# Altium PCB PCB Layout.PcbDoc (part 3 of 3)
Units mm, origin at the board's own origin, x right, y up, seen from the top; angles counter-clockwise.
Board outline 100.03 x 55.01 mm, 4 copper layers (Top Layer, Signal Layer 2, Signal Layer 1, Bottom Layer), stack 0.779 mm thick; 236 components, 218 nets, 813 pads, 395 vias.
Unrouted connection lines stored in the file: 15.
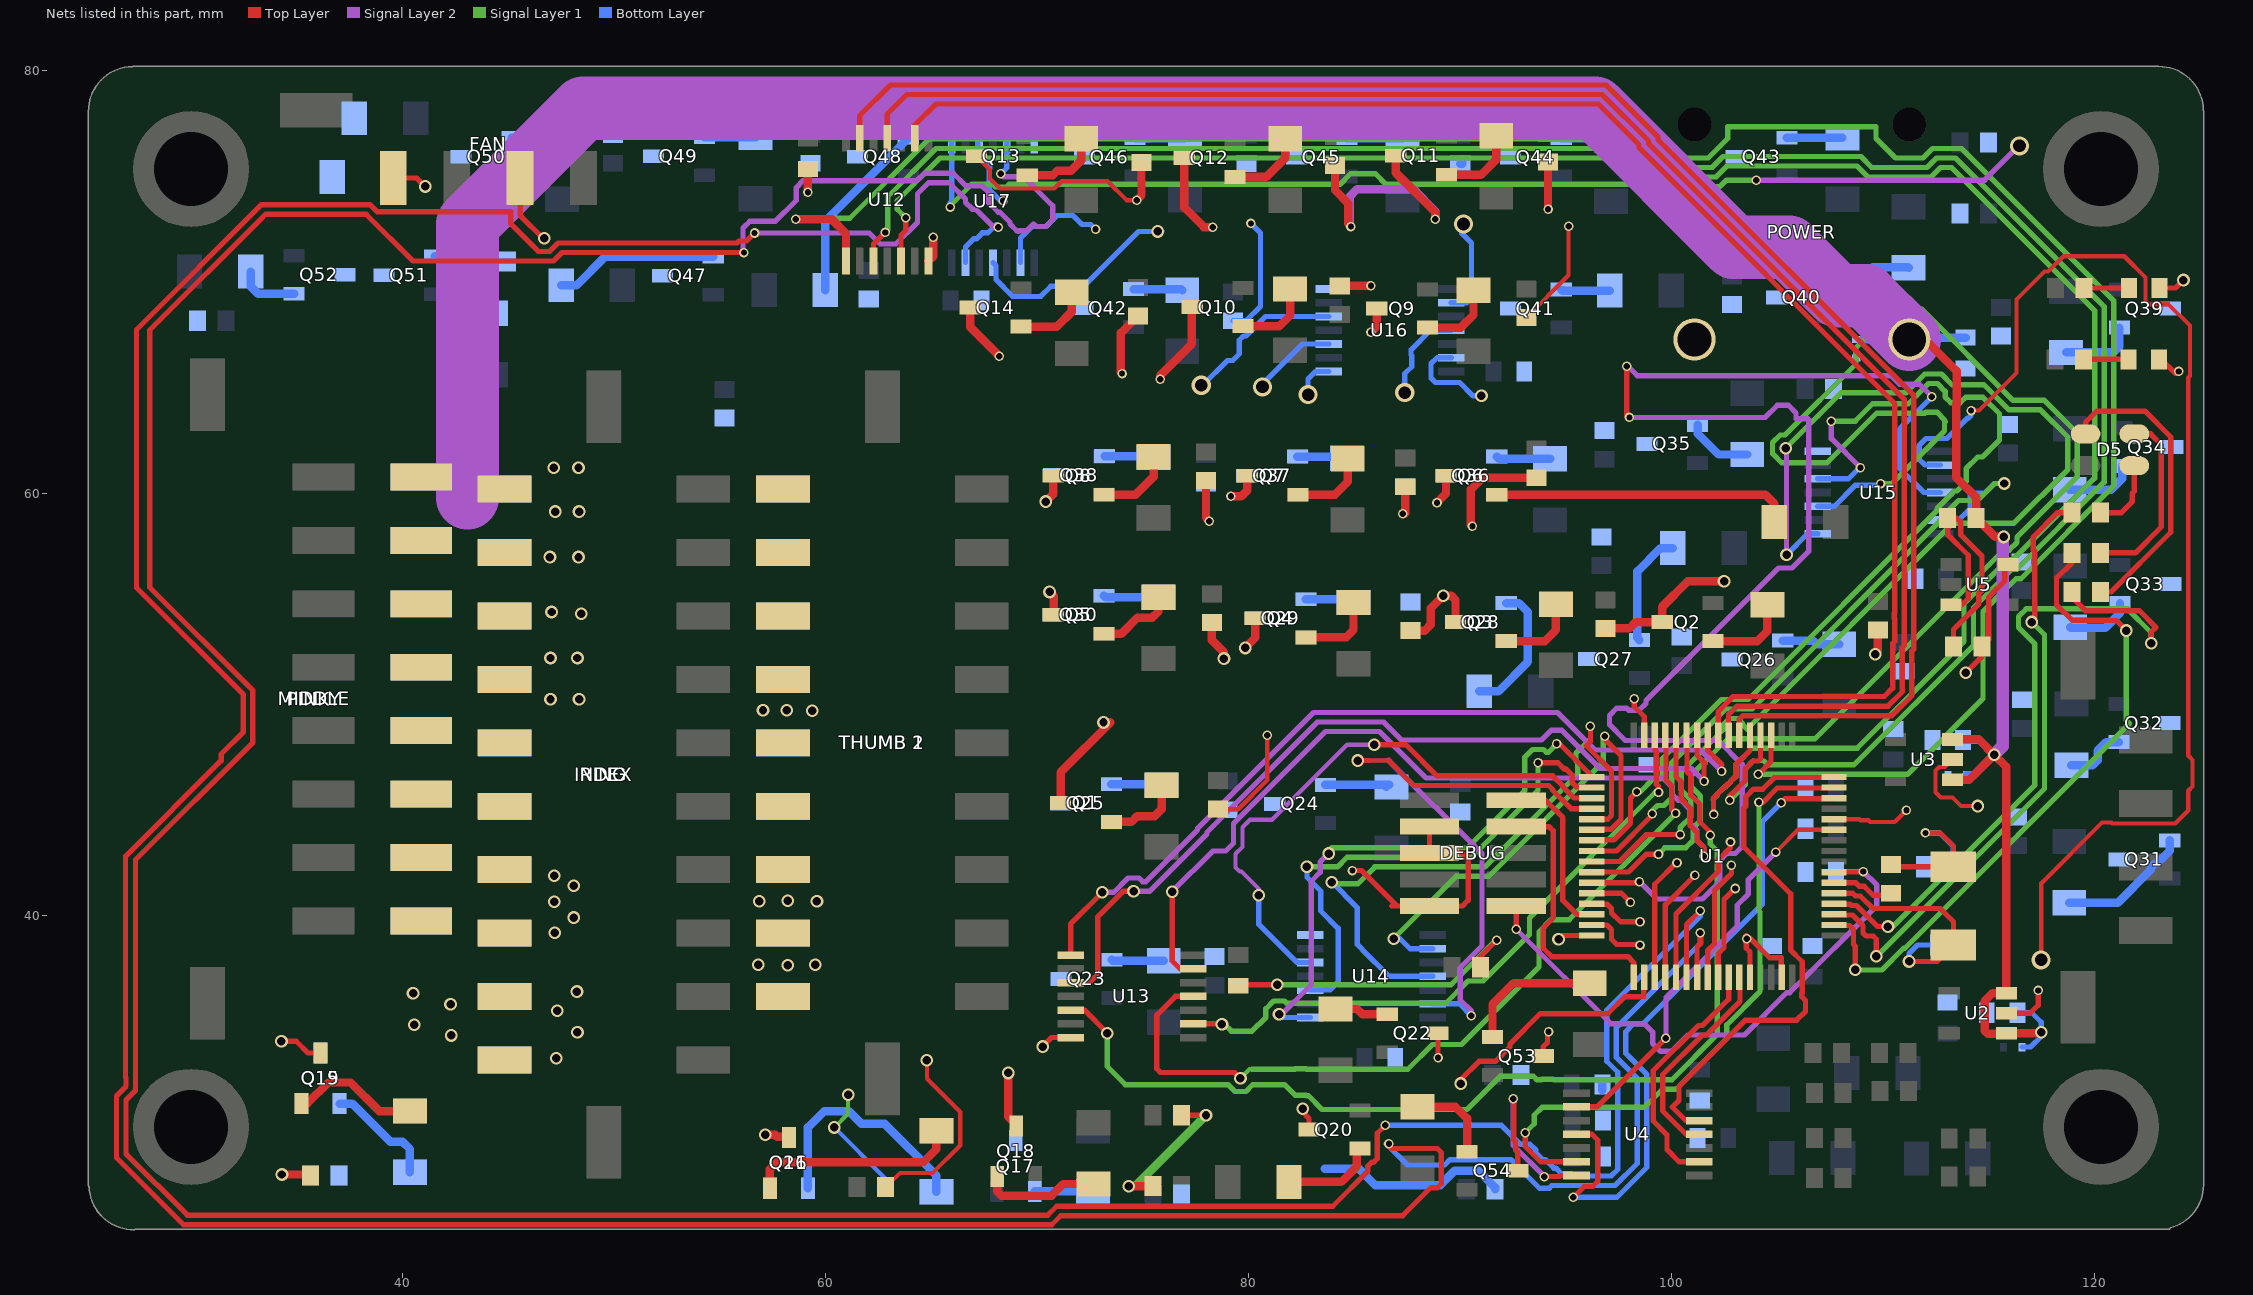
[diagram p5: the nets of this part, all layers, seen from the top]

## Via types
v1: diameter 0.6, hole 0.4, Top Layer to Bottom Layer, tented top, 220 vias
v2: diameter 0.45, hole 0.3, Top Layer to Bottom Layer, tented top, 162 vias
v3: diameter 0.9, hole 0.6, Top Layer to Bottom Layer, tented top, 9 vias
v4: diameter 0.45/0.6/0.6/0.6 (per signal layer), hole 0.3, Top Layer to Bottom Layer, tented top, 1 vias
v5: diameter 0.6/0.6/0.6/0.6 (per signal layer), hole 0.4, Top Layer to Bottom Layer, tented top, 1 vias
v6: diameter 0.6, hole 0.4, Top Layer to Bottom Layer, tented both sides, 1 vias
v7: diameter 0.54, hole 0.3, Top Layer to Bottom Layer, tented top, 1 vias

## Nets (pads, with @x,y where several pads share a name; then routed paths per layer and width w, separated by ;. In a path a pad name is that pad's centre, name@x,y a point inside that pad or via, vN(x,y) a via of type N, cw(c..) or ccw(c..) an arc to the next point about the centre after c; other vN are vias at no path point) (continued)
GND: 3.3VA.2 3.3VD.2 C1.1 C2.1 C3.1 C4.1 C5.1 C6.1 C7.1 C8.1 C9.1 C10.1 C11.2 C12.2 C13.1 C15.1 C16.1 C17.1 C18.1 C19.1 C20.1 C21.1 C22.1 C23.1 C24.1 C25.1 D2.2 D6.1 D7.2 D8.2 DEBUG.3 DEBUG.5 DEBUG.9 FAN.2 FAN.4 POWER.2 Q1.3 Q2.3 Q3.3 Q4.3 Q5.3 Q6.3 Q7.3 Q8.3 Q9.3 Q10.3 Q11.3 Q12.3 Q13.3 Q14.3 Q15.3 Q16.3 Q17.3 Q18.3 Q19.3 Q20.3 Q21.3 Q22.3 Q23.3 Q24.3 Q25.3 Q26.3 Q27.3 Q28.3 Q29.3 Q30.3 Q31.3 Q32.3 Q33.3 Q34.3 Q35.3 Q36.3 Q37.3 Q38.3 Q39.3 Q40.3 Q41.3 Q42.3 Q43.3 Q44.3 Q45.3 Q46.3 Q47.3 Q48.3 Q49.3 Q50.3 Q51.3 Q52.3 Q53.3 Q54.3 R14.1 R15.1 R16.1 R17.1 R18.1 R19.1 R20.1 R21.1 R22.1 R23.1 R24.1 R25.1 R26.1 R27.1 R28.1 R29.1 R30.1 R31.1 R32.1 R33.1 R34.1 R35.1 R36.1 R37.1 R38.1 R39.1 R40.1 R41.1 R42.1 R43.1 R44.1 R45.1 R46.1 R47.1 R48.1 R49.1 R50.1 R51.1 R52.1 R53.1 R54.1 R55.1 R56.1 R57.1 R58.1 R59.1 R60.1 R61.1 R62.1 R63.1 R64.1 R65.1 R66.1 R67.1 R72.2 U1.12 U1.31 U1.60 U1.63 U2.2 U3.2 U4.7 U5.5 U12.7 U13.7 U14.7 U15.7 U16.7 U17.7 | length 207.4
  Top Layer w0.2: R32.1@62.85,27.175 63.525,27.85 65.074,27.85 66.375,29.151 66.375,30.725 64.8,32.3 v1(64.8,33.175) ; Q13.3@67.15,75.925 67.775,75.3 67.775,74.883 68.258,74.4 70.826,74.4 71.176,74.75 73.342,74.75 74.239,73.854 v2(74.729,73.854) ; R66.1@78.575,45.05 79.525,45.05 80.9,46.425 v2(80.9,48.55) ; R22.1@93.15,68.3 95.15,70.3 v2(95.15,72.625) ; U1.12@107.7,44.575 108.901,44.575 108.951,44.525 109.326,44.525 109.401,44.45 110.575,44.45 v2(111.125,45) ; U3.2@113.3,47.4 112.95,47.05 112.676,47.05 112.5,46.874 112.5,45.85 112.75,45.6 113.3,45.6 113.7,45.2 v1(114.5,45.2)
  Top Layer w0.25: v1(34.275,34.075) 34.975,34.075 35.525,33.525 Q19.3@36.125,33.525 ; FAN.4@39.565,74.905 40.67,74.905 v1(41.075,74.5) ; FAN.2@45.565,74.905 45.565,73.135 46.65,72.05 v1(46.7,72.05) ; v1(70.275,33.825) 70.7,34.25 U13.7@71.6,34.25 ; R29.1@76.85,30.575 v1(78,30.575) ; C22.1@79.525,36.7 79.602,36.777 79.629,36.75 v1(81.375,36.75) ; v1(82.579,30.877) 82.579,30.729 82.575,30.725 82.875,30.425 Q20.3@82.875,29.9 ; v2(84.925,42.15) 85.35,42.15 87.025,40.475 ; 86.775,40.475 DEBUG.9@88.575,40.475 90.125,40.475 90.4,40.75 90.4,42.675 90.1,42.975 DEBUG.5@88.575,42.975 DEBUG.3@88.575,44.225 ; v2(88.975,33.3) Q22.3@88.975,34.45 ; R33.1@90.975,37.575 90.975,38.075 v2(91.75,38.85) ; v2@92.55,31.352 92.55,29.416 92.65,29.316 92.65,28.914 92.75,28.814 Q54.3@92.75,27.95 ; Q53.3@93.95,33.375 93.95,33.825 94.15,34.025 94.15,34.475 v2(94.2,34.525) ; v2(94,27.675) 94.725,27.675 94.775,27.725 U4.7@95.525,27.725 ; v2(98.255,50.277) 98.255,49.895 98.725,49.425 U1.31@98.725,48.55 ; U1.60@103.725,37.1 103.725,38.3 103.55,38.475 103.55,39.075 103.58,39.045 v2(103.58,38.927) 103.748,38.927 104.65,38.025 105.2,38.025 105.2,37.125 U1.63@105.225,37.1 ; v1(113.925,51.5) 114.7,52.275 R72.2@114.7,52.75 115.025,53.075 115.025,55.085 115.15,55.21 115.15,55.227 115.774,55.851 115.774,56.474 U5.5@115.925,56.625 ; U2.2@115.85,35.4 116.975,35.4 117.356,35.781 v2(117.356,36.477) ; 3.3VD.2@123.075,66.325 123.128,66.378 123.853,65.653 123.906,65.653 v2(124.006,65.753) ; 3.3VA.2@123.1,69.7 123.85,69.7 v1(124.225,70.075)
  Top Layer w0.4: v1(34.3,27.775) 35.6,27.775 R30.1@35.65,27.725 ; v1(57.15,29.65) 57.625,29.65 57.725,29.55 58.25,29.55 Q21.3@58.275,29.525 ; v2(59.175,74.225) C19.1@59.175,75.325 ; U12.7@64.875,70.975 65.103,71.203 v2(65.103,72.104) ; Q14.3@66.85,68.775 66.85,67.85 v2(68.225,66.475) ; v1(68.653,32.577) 68.653,30.497 69.05,30.1 Q18.3@69.025,30.075 ; v1(70.425,59.6) 70.775,59.95 Q8.3@70.775,60.825 ; v1(70.6,55.325) 70.8,55.125 70.8,54.275 Q5.3@70.775,54.25 ; Q1.3@71.125,45.35 71.125,46.8 73.475,49.15 73.473,49.152 v1(73.154,49.152) ; v2(74.029,65.653) 73.975,65.707 73.975,67.575 R23.1@74.775,68.375 ; v6(74.35,27.225) R31.1@75.5,27.225 ; v2(74.729,73.854) 74.95,74.075 R24.1@74.95,75.625 ; v2(75.829,65.378) 75.829,65.546 75.825,65.55 77.325,67.05 77.325,68.775 Q10.3@77.35,68.8 ; Q12.3@76.975,75.85 76.975,73.5 77.9,72.575 v2(78.325,72.575) ; R18.1@78,60.6 78,58.824 v2@78.149,58.675 ; R16.1@78.275,53.875 78.275,53.05 78.85,52.475 v1(78.85,52.175) ; v2(79.179,59.853) 79.678,59.853 79.95,60.125 Q7.3@79.95,60.825 ; v1(79.85,52.675) 80.325,53.15 Q4.3@80.325,54.075 ; R25.1@84.1,75.5 84.1,74.325 84.725,73.7 84.725,72.733 v2(84.854,72.604) ; R21.1@84.325,69.8 v2(85.8,69.8) ; v2(85.8,67.6) 86.075,67.875 Q9.3@86.075,68.725 ; Q11.3@86.975,75.95 86.975,75.15 88.85,73.275 v2(88.85,72.95) ; v2(87.304,59.028) 87.403,59.028 87.425,59.05 R19.1@87.425,60.3 ; R15.1@87.675,53.5 88.35,53.5 88.625,53.775 88.625,54.55 v1(89.225,55.15) 89.6,55.15 89.8,54.95 Q3.3@89.8,53.9 ; v2(88.925,59.55) 89.35,59.975 Q6.3@89.35,60.825 ; v2(90.6,58.425) 90.525,58.5 90.525,60.175 91.075,60.725 R17.1@93.625,60.725 ; v2(94.175,73.425) R20.1@94.175,75.65 ; R14.1@96.9,53.6 98.025,53.6 98.325,53.9 Q2.3@99.575,53.9 99.575,54.625 100.775,55.825 v1(102.5,55.825) ; v1(109.65,52.375) 109.775,52.5 R67.1@109.775,53.525
  Signal Layer 2 w0.25: v2(92.53,31.352) 92.53,29.145 v2(94,27.675)
  Signal Layer 2 w0.4: v2(84.854,72.604) 84.8,72.658 84.8,74.025 85.15,74.375 87.8,74.375 88.85,73.325 v2(88.85,72.95)
  Signal Layer 1 w0.2: v1(60.425,30) 61.075,30.65 v1(61.075,31.55)
  Signal Layer 1 w0.25: v1(81.375,36.75) 89.58,36.75 91.68,38.85 v2(91.75,38.85)
  Signal Layer 1 w0.4: v6(74.35,27.225) 74.375,27.25 74.675,27.25 v1(78,30.575)
  Bottom Layer w0.2: v1(60.425,30) 62.85,27.575 R27.1@62.85,27.175
  Bottom Layer w0.25: R51.1@79.275,68.15 79.9,68.15 80.575,68.825 80.575,72.3 v2(80.125,72.75)
  Bottom Layer w0.4: 83.625,28.05 85.222,28.05 85.995,27.276 89.086,27.276 89.759,27.95 90.891,27.95 91.675,27.166 R65.1@91.675,27.075 ; R56.1@90.025,75.575 90.116,75.575 R56.1@90.116,75.766 ; C15.1@96.735,31.75 96.75,31.75 C15.1@96.75,32.025
  other v2: 78.15,58.675
IN_1: U1.11 U4.2 | length 19.7
  Top Layer w0.2: v2(104.95,43.025) 106,44.075 U1.11@107.7,44.075
  Top Layer w0.25: U4.2@95.525,30.975 96.5,30.975 v2(99.75,34.225)
  Signal Layer 2 w0.25: v2(99.75,34.225) 99.75,36.15 103.125,39.525 103.125,40.516 103.65,41.041 103.65,41.725 v2(104.95,43.025)
IN_2: U1.14 U4.4 | length 32.1
  Top Layer w0.25: v2(95.375,26.7) 95.895,27.22 96.29,27.22 96.525,27.455 96.525,29.4 96.25,29.675 U4.4@95.525,29.675 ; v2(105.2,45.35) 105.4,45.55 107.675,45.55 U1.14@107.7,45.575
  Bottom Layer w0.25: v2(95.375,26.7) 97.432,26.7 98.85,28.118 98.85,32.507 97.855,33.503 97.855,34.536 98.221,34.902 98.661,34.902 104.3,40.541 104.3,44.45 v2(105.2,45.35)
IN_3: U1.15 U4.6 | length 30.7
  Top Layer w0.25: v2(93.1,29.75) 93.1,29.1 93.825,28.375 U4.6@95.525,28.375 ; v2(104.15,45.375) 104.341,45.375 105.016,46.05 107.675,46.05 U1.15@107.7,46.075
  Signal Layer 1 w0.25: v2(93.1,29.75) 93.525,30.175 93.525,30.584 93.891,30.95 98.725,30.95 99.575,31.8 100.214,31.8 102.625,34.211 102.625,34.85 104.205,36.43 104.205,40.186 104.15,40.241 v2(104.15,45.375)
IN_4: U1.16 U4.12 | length 26.1
  Top Layer w0.25: U4.12@101.325,30.325 100.686,30.325 100.05,30.961 100.37,31.281 100.37,31.94 103.505,35.075 105.934,35.075 106.35,35.491 106.35,36.009 106.175,36.184 106.175,36.34 106.2,36.365 106.2,37.835 105.65,38.385 105.65,41.05 103.425,43.275 103.425,45.095 103.525,45.195 103.525,45.634 103.891,46 104.33,46 104.88,46.55 107.675,46.55 U1.16@107.7,46.575
NetC12_1: C12.1 R4.1 Y1.1 | length 8.1
  Top Layer w0.25: R4.1@110.4,42.325 Y1.1@113.35,42.325 113.35,43.3 112.725,43.925 v2(112.025,43.925)
  Bottom Layer w0.25: v2(112.025,43.925) 112.7,43.925 113.345,43.28 C12.1@113.345,42.325 C12.1@113.35,42.33
NetD3_1: 3.3VA.1 R1.1 | length 2.1
  Top Layer w0.25: R1.1@119.525,69.7 3.3VA.1@121.65,69.7
NetD4_1: 3.3VD.1 R2.1 | length 2.1
  Top Layer w0.25: R2.1@119.5,66.325 3.3VD.1@121.625,66.325
NetD5_1: D5.1 R70.1 | length 14.3
  Top Layer w0.25: D5.1@119.6,62.8 119.6,63.35 120.125,63.875 122.4,63.875 123.625,62.65 123.625,58.15 120.8,55.325 R70.1@120.3,55.325
NetD5_3: D5.3 R68.2 | length 3.5
  Top Layer w0.25: R68.2@120.3,59.075 121.3,59.075 121.8,59.575 121.8,59.984 121.9,60.084 D5.3@121.9,61.3
NetD5_4: D5.4 R69.2 | length 8.8
  Top Layer w0.25: R69.2@120.3,57.175 121.95,57.175 123.175,58.4 123.175,62.3 122.675,62.8 D5.4@121.9,62.8
NetD20_2: D20.2 Q1.1 | length 3.7
  Top Layer w0.4: Q1.1@73.525,44.45 74.473,44.45 74.748,44.725 75.575,44.725 75.9,45.05 D20.2@75.9,46.175
NetD21_2: D21.2 Q2.1 | length 4
  Top Layer w0.4: Q2.1@101.975,53 104.075,53 104.55,53.475 D21.2@104.55,54.725
NetD22_2: D22.2 Q3.1 | length 3.8
  Top Layer w0.4: Q3.1@92.2,53 94.025,53 94.55,53.525 D22.2@94.55,54.75
NetD23_2: D23.2 Q4.1 | length 3.7
  Top Layer w0.4: Q4.1@82.725,53.175 84.625,53.175 84.975,53.525 D23.2@84.975,54.825
NetD24_2: D24.2 Q5.1 | length 3.7
  Top Layer w0.4: Q5.1@73.175,53.35 74,53.35 74.758,54.108 75.458,54.108 75.75,54.4 D24.2@75.75,55.075
NetD25_2: D25.2 Q6.1 | length 14.2
  Top Layer w0.4: Q6.1@91.75,59.925 104.45,59.925 104.875,59.5 D25.2@104.875,58.625
NetD26_2: D26.2 Q7.1 | length 3.7
  Top Layer w0.4: Q7.1@82.35,59.925 84.1,59.925 84.7,60.525 D26.2@84.7,61.625
NetD27_2: D27.2 Q8.1 | length 3.7
  Top Layer w0.4: Q8.1@73.175,59.925 74.675,59.925 75.525,60.775 D27.2@75.525,61.725
NetD28_2: D28.2 Q9.1 | length 3.6
  Top Layer w0.4: Q9.1@88.475,67.825 90.05,67.825 90.65,68.425 D28.2@90.65,69.6
NetD29_2: D29.2 Q10.1 | length 3.7
  Top Layer w0.4: Q10.1@79.75,67.9 81.475,67.9 81.975,68.4 D29.2@81.975,69.65
NetD30_2: D30.2 Q11.1 | length 3.8
  Top Layer w0.4: Q11.1@89.375,75.05 91,75.05 91.725,75.775 D30.2@91.725,76.9
NetD31_2: D31.2 Q12.1 | length 3.6
  Top Layer w0.4: Q12.1@79.375,74.95 80.85,74.95 81.75,75.85 D31.2@81.75,76.75
NetD32_2: D32.2 Q13.1 | length 3.9
  Top Layer w0.4: Q13.1@69.55,75.025 70.744,75.025 70.969,75.25 71.625,75.25 72.1,75.725 D32.2@72.1,76.75
NetD33_2: D33.2 Q14.1 | length 3.6
  Top Layer w0.4: Q14.1@69.25,67.875 70.95,67.875 71.65,68.575 D33.2@71.65,69.5
NetD34_2: D34.2 Q15.1 | length 5.3
  Bottom Layer w0.4: Q15.1@37.025,31.125 37.625,31.125 39.425,29.325 40,29.325 40.35,28.975 D34.2@40.35,27.875
NetD35_2: D35.2 Q16.1 | length 11.3
  Bottom Layer w0.4: Q16.1@59.175,27.125 59.175,30 59.95,30.775 61.104,30.775 61.704,30.175 62.8,30.175 65.25,27.725 D35.2@65.25,26.95
NetD36_2: D36.2 Q17.1 | length 2.8
  Bottom Layer w0.4: Q17.1@69.9,26.975 72.625,26.975 D36.2@72.65,26.95
NetD37_2: D37.2 Q18.1 | length 5.6
  Top Layer w0.4: Q18.1@68.125,27.675 68.125,26.975 68.325,26.775 70.7,26.775 71.25,27.325 D37.2@72.675,27.325
NetD38_2: D38.2 Q19.1 | length 6.1
  Top Layer w0.4: Q19.1@35.225,31.125 35.493,31.125 36.493,32.125 37.55,32.125 38.9,30.775 D38.2@40.35,30.775
NetD39_2: D39.2 Q20.1 | length 4.4
  Top Layer w0.4: D39.2@81.925,27.425 84.4,27.425 85.129,28.154 85.129,28.854 Q20.1@85.275,29
NetD40_2: D40.2 Q21.1 | length 10
  Top Layer w0.4: Q21.1@57.375,27.125 57.375,28.025 57.7,28.35 64.625,28.35 65.25,28.975 D40.2@65.25,29.85
NetD41_2: D41.2 Q22.1 | length 2.6
  Top Layer w0.4: D41.2@84.125,35.6 85.15,35.6 85.4,35.35 Q22.1@86.575,35.35
NetD42_2: D42.2 Q23.1 | length 2.5
  Bottom Layer w0.4: Q23.1@73.55,37.925 73.6,37.875 D42.2@76,37.875
NetD43_2: D43.2 Q24.1 | length 3.2
  Bottom Layer w0.4: Q24.1@83.65,46.2 D43.2@86.675,46.2 ; D43.2@86.425,46.2 D43.2@86.525,46.1
NetD44_2: D44.2 Q25.1 | length 2.4
  Bottom Layer w0.4: Q25.1@73.525,46.225 75.85,46.225 D44.2@75.9,46.175
NetD45_2: D45.2 Q26.1 | length 2.7
  Bottom Layer w0.4: Q26.1@105.275,53.025 106.7,53.025 106.875,52.85 D45.2@107.95,52.85
NetD46_2: D46.2 Q27.1 | length 5.4
  Bottom Layer w0.4: Q27.1@98.5,53.05 98.4,53.15 98.4,56.3 99.5,57.4 D46.2@100.075,57.4
NetD47_2: D47.2 Q28.1 | length 6.4
  Bottom Layer w0.4: D47.2@90.925,50.625 91.825,50.625 93.225,52.025 93.225,54.375 92.8,54.8 Q28.1@92.2,54.8
NetD48_2: D48.2 Q29.1 | length 2.3
  Bottom Layer w0.4: Q29.1@82.725,54.975 84.825,54.975 D48.2@84.975,54.825
NetD49_2: D49.2 Q30.1 | length 2.6
  Bottom Layer w0.4: Q30.1@73.175,55.15 73.25,55.075 D49.2@75.75,55.075
NetD50_2: D50.2 Q31.1 | length 6.3
  Bottom Layer w0.4: D50.2@118.825,40.625 121.125,40.625 122.675,42.175 122.675,42.266 122.909,42.5 123,42.5 123.575,43.075 Q31.1@123.575,43.575
NetD51_2: D51.2 Q32.1 | length 3
  Bottom Layer w0.4: D51.2@118.925,47.125 119.925,47.125 120.175,47.375 120.175,47.825 120.575,48.225 Q32.1@121.175,48.225
NetD52_2: D52.2 Q33.1 | length 3.1
  Bottom Layer w0.4: D52.2@118.875,53.65 118.9,53.625 120.525,53.625 121.225,54.325 Q33.1@121.225,54.8
NetD53_2: D53.2 Q34.1 | length 3.3
  Bottom Layer w0.4: D53.2@118.85,60.15 120.8,60.15 121.325,60.675 Q34.1@121.325,61.275
NetD54_2: D54.2 Q35.1 | length 3.2
  Bottom Layer w0.4: Q35.1@101.25,63.225 101.25,62.816 102.241,61.825 D54.2@103.6,61.825
NetD55_2: D55.2 Q36.1 | length 2.6
  Bottom Layer w0.4: Q36.1@91.75,61.725 91.85,61.625 D55.2@94.275,61.625
NetD56_2: D56.2 Q37.1 | length 2.4
  Bottom Layer w0.4: Q37.1@82.325,61.725 84.6,61.725 D56.2@84.675,61.65
NetD57_2: D57.2 Q38.1 | length 2.3
  Bottom Layer w0.4: Q38.1@73.2,61.75 75.475,61.75 D57.2@75.525,61.7
NetD58_2: D58.2 Q39.1 | length 3.5
  Bottom Layer w0.4: D58.2@118.675,66.65 120.925,66.65 121.2,66.925 Q39.1@121.2,67.825
NetD59_2: D59.2 Q40.1 | length 4.1
  Bottom Layer w0.4: Q40.1@107.375,70.15 109,70.15 109.525,70.675 111.2,70.675 D59.2@111.225,70.65
NetD60_2: D60.2 Q41.1 | length 2.3
  Bottom Layer w0.4: Q41.1@94.8,69.625 94.85,69.575 D60.2@97.1,69.575
NetD61_2: D61.2 Q42.1 | length 2.3
  Bottom Layer w0.4: Q42.1@74.575,69.65 76.825,69.65 D61.2@76.875,69.6
NetD62_2: D62.2 Q43.1 | length 2.6
  Bottom Layer w0.4: Q43.1@105.475,76.8 D62.2@108.1,76.8
NetD63_2: D63.2 Q44.1 | length 2.4
  Bottom Layer w0.4: Q44.1@94.8,76.775 97.075,76.775 D63.2@97.15,76.7
NetD64_2: D64.2 Q45.1 | length 2.6
  Bottom Layer w0.4: Q45.1@84.675,76.775 D64.2@87.3,76.775
NetD65_2: D65.2 Q46.1 | length 2.4
  Bottom Layer w0.4: Q46.1@74.65,76.775 D65.2@77,76.775
NetD66_2: D66.2 Q47.1 | length 7.8
  Bottom Layer w0.4: D66.2@47.5,69.825 48.225,69.825 49.575,71.175 Q47.1@54.7,71.175
NetD67_2: D67.2 Q48.1 | length 8.8
  Bottom Layer w0.4: D67.2@60,69.6 60,72.875 Q48.1@63.925,76.8
NetD68_2: D68.2 Q49.1 | length 2.4
  Bottom Layer w0.4: Q49.1@54.275,76.825 D68.2@56.7,76.825
NetD69_2: D69.2 Q50.1 | length 2.4
  Bottom Layer w0.4: Q50.1@45.175,76.8 D69.2@47.55,76.8
NetD70_2: D70.2 Q51.1 | length 4.5
  Bottom Layer w0.4: Q51.1@41.525,71.2 42.4,71.2 42.725,70.875 42.725,70.275 43.5,69.5 43.825,69.5 44.2,69.125 D70.2@44.2,68.5
NetD71_2: D71.2 Q52.1 | length 2.9
  Bottom Layer w0.4: D71.2@32.825,70.475 32.825,69.775 33.175,69.425 Q52.1@34.875,69.425
NetD72_2: D72.2 Q53.1 | length 6.6
  Top Layer w0.4: Q53.1@91.55,34.275 91.55,35.825 92.55,36.825 D72.2@96.15,36.825
NetD73_2: D73.2 Q54.1 | length 4.2
  Top Layer w0.4: D73.2@88,30.975 89.8,30.975 90.35,30.425 Q54.1@90.35,28.85
NetR71_2: R71.2 R72.1 U5.3 | length 12.8
  Top Layer w0.25: U5.3@113.15,54.725 113.75,54.725 114.05,55.025 114.05,57.06 113.075,58.035 R71.2@113.075,58.825 113.5,58.825 113.7,58.625 113.7,58.025 114.7,57.025 114.7,55.396 114.55,55.246 114.55,54.75 113.35,53.55 R72.1@113.35,52.75
NRST: C8.2 DEBUG.10 U1.7 | length 28.3
  Top Layer w0.25: v2(92.675,39.375) DEBUG.10@92.675,40.475 ; U1.7@107.7,42.075 109.053,42.075 v2(109.08,42.102)
  Signal Layer 2 w0.25: v2(92.675,39.375) 97.148,34.902 98.739,34.902 98.74,34.9 99.125,34.515 99.125,33.966 99.491,33.6 100.009,33.6 100.784,34.375 103.466,34.375 105.466,36.375 105.605,36.375 109.725,40.495 109.725,41.457 v2(109.08,42.102)
  Bottom Layer w0.25: C8.2@107.8,42.075 107.827,42.102 v2(109.08,42.102)
O1.1.E: U1.20 U12.3 | length 103.4
  Top Layer w0.25: U12.3@62.275,70.975 62.275,71.775 v2(62.825,72.325) ; v2(102.775,45.475) 102.775,45.7 102.827,45.752 102.85,45.752 103.5,46.402 103.5,46.959 103.866,47.325 104.114,47.325 104.225,47.436 U1.20@104.225,48.55
  Signal Layer 1 w0.2: 103.866,47.325 104.384,47.325
  Signal Layer 1 w0.25: v2(62.825,72.325) 62.95,72.45 62.95,74.011 65.239,76.3 99.361,76.3 100.261,75.4 101.939,75.4 102.454,75.915 108.971,75.915 109.486,75.4 112.099,75.4 112.549,75.85 113.45,75.85 120.475,68.825 120.475,60.518 116.357,56.4 116.121,56.4 114.3,54.579 114.3,52.8 108.65,47.15 104.559,47.15 104.384,47.325 ; v2(102.775,45.475) 103.5,46.2 103.5,46.959 103.866,47.325
O1.1.F: U1.19 U12.1 | length 109.1
  Top Layer w0.25: v2(104.125,46.7) 104.725,47.3 U1.19@104.725,48.55
  Top Layer w0.4: v2(58.6,72.95) 60.3,72.95 60.975,72.275 U12.1@60.975,70.975
  Signal Layer 1 w0.25: v2(58.6,72.95) 58.55,73 61.15,73 64.9,76.75 99.548,76.75 100.448,75.85 101.752,75.85 102.675,76.773 102.675,77.325 109.685,77.325 109.685,76.773 110.608,75.85 111.912,75.85 112.362,76.3 113.729,76.3 120.925,69.104 120.925,60.332 116.543,55.95 116.307,55.95 114.75,54.393 114.75,50.278 111.172,46.7 v2(104.125,46.7)
O1.2.E: U1.22 U12.13 | length 81.3
  Top Layer w0.25: U12.13@61.625,76.775 61.625,77.85 63.075,79.3 96.923,79.3 99.375,76.848 99.375,76.71 111.475,64.61 111.475,52.618 111.375,52.518 111.375,50.402 110.448,49.475 103.4,49.475 103.225,49.3 U1.22@103.225,48.55
O1.2.F: U1.21 U12.5 | length 103.3
  Top Layer w0.25: U12.5@63.575,70.975 63.575,72.194 63.803,72.422 v2(63.803,73.029) ; v2(102.005,44.802) 102.005,45.529 101.975,45.559 102.683,46.267 ; 102.664,46.202 103.05,46.588 103.05,47.145 103.725,47.82 U1.21@103.725,48.55
  Signal Layer 1 w0.25: v2(63.803,73.029) 63.796,73.029 63.4,73.425 63.4,73.825 65.425,75.85 99.175,75.85 100.075,74.95 102.125,74.95 102.64,75.465 108.785,75.465 109.3,74.95 112.285,74.95 112.735,75.4 113.264,75.4 120.025,68.639 120.025,60.705 116.17,56.85 115.934,56.85 113.85,54.766 113.85,52.986 108.794,47.931 103.835,47.931 103.05,47.145 103.05,46.588 102.562,46.1 ; v2(102.005,44.802) 102.005,45.483 101.975,45.513 102.15,45.688 102.15,45.734 102.516,46.1
O1.3.E: U1.24 U12.9 | length 76.7
  Top Layer w0.25: U12.9@64.225,76.775 64.225,77.4 65.225,78.4 96.55,78.4 98.475,76.475 98.475,76.338 110.575,64.238 110.575,54.34 110.55,54.315 110.55,54.085 110.575,54.06 110.575,52.99 110.475,52.89 110.475,50.775 110.075,50.375 102.925,50.375 102.225,49.675 U1.24@102.225,48.55
O1.3.F: U1.23 U12.11 | length 79.2
  Top Layer w0.25: U12.11@62.925,76.775 62.925,77.925 63.85,78.85 96.736,78.85 98.925,76.661 98.925,76.524 111.025,64.424 111.025,52.804 110.925,52.704 110.925,50.589 110.261,49.925 103.111,49.925 102.711,49.525 102.711,48.564 U1.23@102.725,48.55
O1.AB: U1.25 U13.1 | length 39.8
  Top Layer w0.25: U13.1@71.675,38.225 U13.1@71.6,38.15 71.6,39.625 v1(73.1,41.125) ; U1.25@101.725,48.55 101.725,47.84 102.405,47.16 102.38,47.135 v2(102.38,46.852)
  Signal Layer 2 w0.25: v1(73.1,41.125) 73.641,41.125 74.316,41.8 74.834,41.8 75.009,41.625 75.164,41.625 77.6,44.061 77.6,44.145 83.08,49.625 94.627,49.625 96.402,47.85 101.382,47.85 v2(102.38,46.852)
O1.AD: U1.26 U13.3 | length 40.6
  Top Layer w0.25: U13.3@71.6,36.85 72.5,36.85 72.875,37.225 72.875,39.95 74.1,41.175 v1(74.575,41.175) ; U1.26@101.225,48.55 101.225,47.6 101.605,47.22 101.555,47.17 v2(101.555,46.377)
  Signal Layer 2 w0.25: v1(74.575,41.175) 75.35,41.175 78.05,43.875 78.05,43.959 83.266,49.175 86.395,49.175 87.243,48.327 93.871,48.327 94.321,48.777 94.838,48.777 96.641,46.975 100.957,46.975 v2(101.555,46.377)
O2.1.E: U1.28 U13.13 | length 43.1
  Top Layer w0.25: v1(76.4,41.15) 76.4,37.88 76.78,37.5 U13.13@77.4,37.5 ; U1.28@100.225,48.55 100.225,46.584 100.48,46.329 100.48,45.525 100.9,45.105 100.9,44.272 101.225,43.947 101.225,43.566 101.55,43.241 v2(101.55,42.825)
  Signal Layer 2 w0.25: v1(76.4,41.15) 78.325,43.075 78.934,43.075 79.3,43.441 79.3,43.959 79.3,44.373 83.652,48.725 86.209,48.725 88.409,46.525 99.609,46.525 100.025,46.109 100.025,45.775 100.323,45.477 100.464,45.477 100.875,45.066 100.875,44.4 101.225,44.05 101.225,43.566 101.55,43.241 v2(101.55,42.825)
O2.1.F: U1.27 U13.5 | length 50.1
  Top Layer w0.25: U13.5@71.6,35.55 72.25,35.55 73.329,34.471 v1(73.329,34.452) ; U1.27@100.725,48.55 100.75,48.525 100.75,46.816 100.93,46.636 100.93,45.711 101.35,45.291 101.35,44.459 101.85,43.959 v2(101.85,43.825)
  Signal Layer 1 w0.25: v1(73.329,34.452) 73.329,32.879 74.182,32.025 79.047,32.025 79.37,31.702 79.888,31.702 80.211,32.025 81.716,32.025 82.216,31.525 82.734,31.525 82.757,31.502 82.838,31.502 83.489,30.85 90.345,30.85 91.922,32.427 93.475,32.427 93.651,32.25 93.869,32.25 93.896,32.277 94.413,32.277 94.44,32.25 100.027,32.25 102.175,34.398 102.175,43.084 101.85,43.409 v2(101.85,43.825)
O2.2.E: U1.30 U13.9 | length 30.6
  Top Layer w0.25: U13.9@77.4,34.9 78.825,34.9 78.775,34.85 78.754,34.871 v1(78.754,34.877) ; U1.30@99.225,48.55 99.25,48.525 99.25,47.815 99.3,47.765 99.3,46.236 99.4,46.136 v2(99.4,45.85)
  Signal Layer 1 w0.25: v1(78.754,34.877) 78.873,34.877 79.198,34.552 80.18,34.552 80.829,35.201 80.829,35.611 81.195,35.977 81.713,35.977 81.815,35.875 89.341,35.875 90.391,36.925 91.109,36.925 93.3,39.116 93.3,39.906 99.244,45.85 v2(99.4,45.85)
O2.2.F: U1.29 U13.11 | length 39.4
  Top Layer w0.25: U13.11@77.4,36.2 76.55,36.2 75.675,35.325 75.675,32.775 75.848,32.602 79.354,32.602 v1(79.629,32.327) ; U1.29@99.725,48.55 99.75,48.525 99.75,46.422 100.03,46.143 100.03,45.02 100.198,44.852 v2(100.205,44.852)
  Signal Layer 1 w0.2: v1(79.629,32.327) 80.052,32.75 80.175,32.75
  Signal Layer 1 w0.25: 80.175,32.75 82.191,32.75 82.216,32.775 82.734,32.775 82.759,32.75 87.541,32.75 88.716,33.925 90.084,33.925 93.75,37.591 93.75,39.25 94.325,39.825 95.178,39.825 v2(100.205,44.852)
O2.3.E: U1.34 U14.3 | length 24.5
  Top Layer w0.25: v2(93.705,47.252) 94.637,47.252 94.955,46.934 94.998,46.977 95.325,46.65 95.325,46.29 95.515,46.1 U1.34@96.225,46.1
  Signal Layer 1 w0.25: v1(82.775,42.325) 84.216,42.325 84.666,42.775 90.55,42.775 93.705,45.93 v2(93.705,47.252)
  Bottom Layer w0.25: v1(82.775,42.325) 82.775,41.834 83.425,41.184 83.425,40.241 84.25,39.416 84.25,36.875 83.875,36.5 U14.3@82.925,36.5
O2.3.F: U1.33 U14.1 | length 26.9
  Top Layer w0.25: v2(94.58,48.152) 94.661,48.152 94.684,48.175 96.25,46.609 U1.33@96.25,46.575
  Signal Layer 2 w0.25: v1(81.454,35.352) 81.454,35.229 82.975,36.75 82.975,41.641 83.4,42.066 83.4,42.548 v1(83.804,42.952)
  Signal Layer 1 w0.25: v1(83.804,42.952) 83.804,43.079 83.95,43.225 90.364,43.225 93.08,45.941 93.08,47.511 93.446,47.877 93.963,47.877 94.096,47.744 94.194,47.744 94.602,48.152 v2(94.58,48.152)
  Bottom Layer w0.25: v1(81.454,35.352) 81.454,35.346 81.55,35.25 81.5,35.2 U14.1@82.925,35.2
O2.AB: U1.35 U14.5 | length 27.6
  Top Layer w0.25: v1(85.95,48.1) 87.45,48.1 88.925,46.625 94.396,46.625 94.875,46.146 94.875,46.104 95.404,45.575 U1.35@96.25,45.575
  Signal Layer 2 w0.2: v1(80.5,40.975) 80.5,41.279 79.677,42.102 79.597,42.102 79.4,42.299 79.4,42.94 79.725,43.265 79.725,44.197 80.08,44.552 80.577,44.552 80.58,44.55 81.125,44.55 84.675,48.1 v1(85.95,48.1)
  Bottom Layer w0.25: v1(80.5,40.975) 80.5,39.605 82.305,37.8 U14.5@82.925,37.8
O2.AD: U1.36 U14.13 | length 30.1
  Top Layer w0.2: 85.698,47.35 86.648,47.35 86.661,47.336
  Top Layer w0.25: v1(85.175,47.35) 85.698,47.35 ; 86.661,47.336 87.823,46.175 94.21,46.175 94.4,45.985 94.4,45.943 95.268,45.075 U1.36@96.25,45.075
  Signal Layer 2 w0.2: v1(85.175,47.35) 86.625,47.35 86.636,47.361
  Signal Layer 2 w0.25: 86.636,47.361 91.05,42.948 91.05,38.591 90.025,37.566 90.025,36.041 90.55,35.516 v2(90.55,35.275)
  Bottom Layer w0.25: U14.13@88.725,35.85 89.975,35.85 v2(90.55,35.275)
O3.1.E: U1.38 U14.9 | length 22.5
  Top Layer w0.25: U1.38@96.25,44.075 96.275,44.1 97.161,44.1 97.625,44.564 97.625,47.591 96.85,48.366 v2(96.85,48.5)
  Signal Layer 1 w0.25: v1(86.875,38.925) 89.825,41.875 91.373,41.875 96.783,47.285 96.783,48.433 v2(96.85,48.5)
  Bottom Layer w0.25: v1(86.875,38.925) 87.175,38.925 87.65,38.45 U14.9@88.725,38.45
O3.1.F: U1.37 U14.11 | length 29.8
  Top Layer w0.25: v2(96.18,48.977) 96.18,48.245 95.987,48.052 95.985,48.05 97.175,46.86 97.175,44.75 97,44.575 U1.37@96.25,44.575
  Signal Layer 1 w0.25: v1(83.95,41.6) 84.025,41.525 85.184,41.525 85.984,42.325 91.186,42.325 95.58,46.718 95.58,47.236 95.5,47.316 95.5,47.7 96.18,48.38 v2(96.18,48.977)
  Bottom Layer w0.25: v1(83.95,41.6) 85.15,40.4 85.15,38.666 85.4,38.416 85.4,38.4 86.65,37.15 U14.11@88.725,37.15
O3.2.E: U1.40 U15.13 | length 32
  Top Layer w0.25: U1.40@96.25,43.075 97.409,43.075 99.105,44.771 v2(99.105,44.827)
  Signal Layer 1 w0.25: v2(99.105,44.827) 99.105,44.98 99.35,45.225 99.659,45.225 100.094,45.66 100.094,45.682 100.03,45.746 100.03,47.253 102.565,49.788 103.832,49.788 113.025,58.981 113.025,59.086 113.592,59.653 114.487,59.653 115.287,60.453 v1(115.756,60.453)
  Bottom Layer w0.25: U15.13@112.725,58.725 113.6,58.725 114.13,59.255 114.13,59.855 114.275,60 114.834,60 115.287,60.453 v1(115.756,60.453)
O3.2.F: U1.39 U15.5 | length 44.7
  Top Layer w0.25: U1.39@96.25,43.575 96.275,43.6 97.298,43.6 98.075,44.377 98.075,45.575 v2(98.375,45.875)
  Signal Layer 2 w0.25: v2(107.575,63.4) 107.575,62.575 v2(108.95,61.2)
  Signal Layer 1 w0.25: v2(98.375,45.875) 98.541,45.875 99.141,46.475 99.496,46.475 99.58,46.559 99.58,47.439 102.379,50.238 103.646,50.238 112.575,59.168 112.575,59.273 113.405,60.103 113.51,60.103 113.95,60.543 113.95,61.156 114.497,61.703 114.714,61.703 115.525,62.514 115.525,63.75 114.747,64.528 113.922,64.528 113.669,64.275 113.223,64.275 112.955,64.542 112.955,64.812 112.589,65.178 112.178,65.178 111.225,64.225 109.527,64.225 108.702,63.4 v2(107.575,63.4)
  Bottom Layer w0.25: U15.5@106.925,60.675 108.38,60.675 108.905,61.2 v2(108.95,61.2)
O3.3.E: U1.42 U15.3 | length 73.1
  Top Layer w0.25: U1.42@96.25,42.075 97.975,42.075 98.825,42.925 v2(99.4,42.925)
  Signal Layer 1 w0.25: v2(99.4,42.925) 99.7,43.225 100.684,43.225 101.05,43.591 101.05,44.177 101.38,44.507 101.38,45.668 100.93,46.118 100.93,46.636 102.675,48.381 106.806,48.381 115.725,57.3 115.984,57.3 116.35,57.666 116.35,57.925 119.209,60.784 119.209,62.828 117.65,64.386 116.161,64.386 111.848,68.7 110.575,68.7 108.728,66.853 108.728,66.092 105.386,62.75 105.157,62.75 104.791,62.384 104.791,61.866 105.225,61.432 107.371,61.432 109.714,63.775 111.994,63.775 112.047,63.828 112.564,63.828 112.93,63.462 112.93,63.41 112.962,63.378 112.93,63.346 112.93,62.944 110.436,60.45 v2(109.9,60.45)
  Bottom Layer w0.25: U15.3@106.925,59.375 107.716,59.375 108.716,60.375 109.825,60.375 v2(109.9,60.45)
O3.3.F: U1.41 U15.1 | length 57.8
  Top Layer w0.25: U1.41@96.25,42.575 97.55,42.575 98.825,43.85 v2(100.425,43.85)
  Signal Layer 2 w0.25: v1(105.416,62.125) 105.455,62.086 v1(105.455,57.078)
  Signal Layer 1 w0.25: v2(100.425,43.85) 100.425,44.188 100.93,44.693 100.93,45.482 100.48,45.932 100.48,46.823 102.488,48.831 102.488,49.075 102.752,49.338 103.125,49.338 103.388,49.075 103.388,49.023 103.581,48.831 113.475,58.725 113.475,58.575 115.075,58.575 ; v1@105.296,62.004 v1(105.416,62.125) 106.95,63.659 108.041,64.75 111.113,64.75 111.991,65.628 112.776,65.628 113.279,65.125 114.786,65.125 115.975,63.936 117.464,63.936 118.759,62.641 118.759,61.122 116.215,58.578 115.05,58.578
  Bottom Layer w0.25: v1(105.455,57.078) 106.452,58.075 U15.1@106.925,58.075
O4.1.E: U1.44 U15.9 | length 59.9
  Top Layer w0.2: v2(114.181,63.903) 114.553,63.903 116.325,65.675 116.325,69.149 117.651,70.475 117.825,70.475 118.55,71.2 121.424,71.2 122.425,70.199 122.425,69.101 122.601,68.925 123.525,68.925 124.531,67.919 124.531,65.536 124.45,65.455 124.45,47.582 124.65,47.382 124.65,46.123 124.45,45.923 124.45,44.991 123.839,44.38 120.862,44.38 120.817,44.425 120.383,44.425 117.5,41.542 v3@117.5,37.9 ; v3(117.5,37.925) v3@117.5,37.9 ; v3@117.65,37.75 v3@117.5,37.9
  Top Layer w0.25: U1.44@96.25,41.075 97.65,41.075 v2(98.075,40.65)
  Bottom Layer w0.25: U15.9@112.725,61.325 112,61.325 111.725,61.6 111.725,62.245 112.058,62.578 113.037,62.578 114.012,63.553 114.04,63.525 114.181,63.665 v2(114.181,63.903)
O4.1.F: U1.43 U15.11 | length 72.6
  Top Layer w0.25: U1.43@96.25,41.575 98.45,41.575 v2(98.5,41.625) ; v2(97.905,66.003) 97.905,63.68 97.9,63.675 v2@98.025,63.55
  Signal Layer 2 w0.25: v2(97.905,66.003) 97.947,66.003 98.4,65.55 110.394,65.55 110.794,65.15 111.734,65.15 v2(112.33,64.553) ; v2(98.025,63.575) 104.443,63.575 105.021,64.153 105.539,64.153 105.905,63.787 105.905,63.52 106.453,63.52 106.5,63.472 106.5,57.239 105.714,56.453 105.075,56.453 98.805,50.183 98.805,50.05 98.483,49.727 97.983,49.727 97.883,49.827 97.427,49.827 97.078,49.478 97.078,49.05 97.828,48.3 102.225,48.3 103.355,47.17 103.355,43.274 103.031,42.95 102.622,42.95 102.3,42.628 102.3,41.625 101.475,40.8 99.325,40.8 v2(98.5,41.625)
  Bottom Layer w0.25: v2(112.33,64.553) 110.825,63.048 110.825,61.15 111.95,60.025 U15.11@112.725,60.025
O4.2.E: U1.47 U16.13 | length 7.4
  Top Layer w0.25: U1.47@96.25,39.575 96.96,39.575 97.175,39.36 97.175,38.9 97.425,38.65 98.5,38.65 v2(98.525,38.625)
  Bottom Layer w0.25: U16.13@89.6,66.4 88.925,66.4 88.645,66.12 88.645,65.435 88.855,65.225 90,65.225 90.625,64.6 v1(91.025,64.6)
O4.2.F: U1.45 U16.5 | length 10.5
  Top Layer w0.25: U1.45@96.25,40.575 96.275,40.55 96.985,40.55 97.175,40.36 97.175,40.15 97.6,39.725 v2(98.525,39.725)
  Bottom Layer w0.25: v3(77.775,65.1) 77.843,65.1 79.018,66.275 79.265,66.275 79.575,66.585 79.575,67.225 79.775,67.425 79.885,67.425 80.81,68.35 U16.5@83.8,68.35
O4.3.E: U16.3 | length 4
  Bottom Layer w0.25: v3(80.675,65.025) 80.675,65.159 82.566,67.05 U16.3@83.8,67.05
O4.3.F: U1.48 U16.1 | length 3.5
  Top Layer w0.25: v1(94.675,38.9) 94.85,39.075 U1.48@96.25,39.075
  Signal Layer 2 w0.25: v3@82.8,64.675 82.822,64.653 v3(82.829,64.653)
  Bottom Layer w0.25: v3(82.829,64.653) 82.829,65.396 83.183,65.75 U16.1@83.8,65.75
O4.AB: U1.50 U16.11 | length 15.9
  Top Layer w0.25: v1(90.05,32.075) 90.05,32.26 90.915,33.125 91.685,33.125 92.375,33.815 92.375,33.95 93.8,35.375 97,35.375 97.8,36.175 98.7,36.175 98.7,37.075 U1.50@98.725,37.1
  Bottom Layer w0.25: v3(87.4,64.75) 87.4,65.646 87.729,65.975 87.729,66.499 87.7,66.528 87.7,66.775 88.625,67.7 U16.11@89.6,67.7
O4.AD: U1.51 U16.9 | length 10.7
  Top Layer w0.25: U1.51@99.225,37.1 99.225,41.5 100.275,42.55 v2(100.275,42.525)
  Bottom Layer w0.25: U16.9@89.6,69 90.325,69 90.555,69.23 90.555,71.82 90.1,72.275 90.179,72.354 v3(90.179,72.729)
O5.1.E: U1.53 U17.3 | length 11
  Top Layer w0.25: U1.53@100.225,37.1 100.225,40.1 102.225,42.1 102.225,42.659 102.805,43.239 v2(102.805,43.502)
  Bottom Layer w0.25: U17.3@67.275,76.7 67.2,76.625 67.2,76.155 67.775,75.58 67.775,75.353 67.75,75.328 67.75,74.35 68.271,73.829 v2(68.403,73.829)
O5.1.F: U1.52 U17.1 | length 61.5
  Top Layer w0.25: U1.52@99.725,37.1 99.725,40.525 v2(101.125,41.925)
  Signal Layer 2 w0.25: v2(104.025,74.8) 114.825,74.8 116.338,76.313 v3@116.338,76.713
  Signal Layer 1 w0.25: v2(65.903,73.529) 65.903,73.587 66.919,74.604 67.913,74.604 68.041,74.475 68.559,74.475 68.684,74.6 84.335,74.6 84.835,75.1 86.015,75.1 86.515,74.6 99.788,74.6 99.888,74.5 102.312,74.5 102.612,74.8 v2(104.025,74.8)
  Bottom Layer w0.25: 65.953,73.778 65.903,73.728 v2(65.903,73.529) 65.953,73.529 65.975,73.55 U17.1@65.975,76.7
  other v3: 116.475,76.425
O5.2.E: U1.55 U17.13 | length 192.3
  Top Layer w0.25: v2(56.65,72.3) 56.275,71.925 55.922,71.925 55.822,71.825 47.359,71.825 46.959,71.425 46.441,71.425 45.115,72.751 45.115,73.31 38.795,73.31 38.467,73.639 33.339,73.639 27.425,67.725 27.425,55.525 32.475,50.475 32.475,48.7 31.425,47.65 31.425,47.345 26.9,42.82 26.9,32.375 26.925,32.35 26.925,31.935 26.475,31.485 26.475,28.565 29.64,25.4 70.704,25.4 71.129,25.825 87.3,25.825 88.625,27.15 88.935,27.15 89.125,27.34 89.125,28.81 88.935,29 86.75,29 86.654,29.096 v2(86.654,29.226) ; U1.55@101.225,37.1 101.225,38.525 101.4,38.7 101.4,39.175 v2(101.375,39.2)
  Signal Layer 2 w0.25: v2(56.65,72.3) 62.072,72.3 62.597,71.775 63.327,71.775 64.353,72.801 64.353,74.156 64.872,74.675 65.86,74.675 66.628,73.907 66.628,73.751 66.95,73.429 67.106,73.429 67.957,72.579 v2(68.178,72.579)
  Bottom Layer w0.25: U17.13@66.625,70.9 66.625,71.639 67.011,72.025 67.144,72.025 67.424,72.305 67.68,72.305 68.079,72.704 68.154,72.629 v2@68.178,72.604 ; v2@68.075,72.55 68.178,72.653 v2@68.178,72.604 ; v2(68.178,72.579) v2@68.178,72.604 ; v2@86.525,29.225 87.525,28.225 89.292,28.225 89.542,28.475 92.422,28.475 93.772,27.125 94.228,27.125 94.353,27.25 97.346,27.25 98.4,28.304 98.4,32.321 97.405,33.316 97.405,34.722 101.375,38.692 v2(101.375,39.2)
O5.2.F: U1.54 U17.5 | length 192.5
  Top Layer w0.25: 33.4,73.064 28.05,67.714 28.05,55.536 32.925,50.661 32.925,48.209 27.375,42.659 27.375,31.749 26.925,31.299 26.925,28.751 29.826,25.85 70.517,25.85 70.942,26.275 83.992,26.275 85.654,27.937 85.654,28.179 85.825,28.35 85.925,28.35 86.1,28.525 86.1,28.54 86.1,29.725 v2(86.475,30.1) ; 33.525,73.189 38.28,73.189 40.494,70.975 47.145,70.975 47.545,71.375 v2(56.15,71.375) ; U1.54@100.725,37.1 100.725,39.6 v2(101.375,40.25)
  Signal Layer 2 w0.25: v2(56.15,71.375) 56.1,71.425 56.1,72.528 56.422,72.85 57.625,72.85 58.625,73.85 58.625,74.453 58.947,74.775 64.336,74.775 64.686,75.125 66.046,75.125 66.643,74.529 67.406,74.529 67.728,74.206 67.728,73.726 68.176,73.279 68.256,73.279 68.728,72.806 68.728,72.726 69.051,72.404 69.096,72.404 69.125,72.375 69.154,72.404 69.431,72.404 69.506,72.404 69.828,72.726 69.853,72.726 69.976,72.604 70.431,72.604 70.753,72.926 70.753,73.583 69.37,74.966 68.434,74.966 v2(68.3,75.1)
  Bottom Layer w0.25: v2(68.3,75.1) 68.575,75.375 U17.5@68.575,76.7 ; v2(86.475,30.1) 91.972,30.1 92.872,29.2 93.328,29.2 93.6,28.928 93.6,28.797 93.922,28.475 94.053,28.475 94.453,28.075 94.55,28.075 94.8,27.825 95.264,27.825 95.389,27.7 97.16,27.7 97.475,28.015 97.475,32.61 96.955,33.13 96.955,35.558 101.375,39.978 v2(101.375,40.25)
O5.3.E: U1.57 U17.9 | length 10
  Top Layer w0.25: U1.57@102.225,37.1 102.225,38.225 102.5,38.5 102.5,40.775 v2(103.025,41.3)
  Bottom Layer w0.25: U17.9@69.225,70.9 69.225,72.061 69.767,72.604 70.431,72.604 70.953,73.125 71.709,73.125 72.134,72.7 72.55,72.7 v2(72.775,72.475)
O5.3.F: U1.56 U17.11 | length 16.4
  Top Layer w0.25: U1.56@101.725,37.1 101.725,38.361 102.05,38.686 102.05,41.209 102.85,42.009 v2(102.85,42.4)
  Bottom Layer w0.25: U17.11@67.925,70.9 68.07,70.755 68.07,70.094 68.864,69.3 70.181,69.3 70.656,69.775 72.211,69.775 74.811,72.375 75.7,72.375 v1@75.825,72.5 ; v1(75.725,72.375) 75.9,72.375 75.904,72.379 v1@75.804,72.479
O5.AB: U1.59 U4.11 | length 9.5
  Top Layer w0.25: U4.11@101.325,29.675 100.7,29.675 99.6,30.775 99.6,32.5 101.475,34.375 101.67,34.375 103.25,35.955 103.25,36.45
O5.AD: U1.58 U4.9 | length 11.8
  Top Layer w0.25: U4.9@101.325,28.375 100.375,28.375 99.8,28.95 99.8,29.65 99.15,30.3 99.15,32.686 101.289,34.825 101.484,34.825 102.725,36.066 U1.58@102.725,37.1
OSC_IN: C11.1 U1.5 Y1.2 | length 11.7
  Top Layer w0.25: U1.5@107.7,41.075 108.587,41.075 108.712,40.95 108.944,40.95 109.544,40.35 112.725,40.35 113.35,39.725 Y1.2@113.35,38.625 112.575,37.85 v1(111.25,37.85)
  Bottom Layer w0.25: v1(111.25,37.85) 111.25,38.225 111.65,38.625 C11.1@112.655,38.625
OSC_OUT: R4.2 U1.6 | length 2.9
  Top Layer w0.25: U1.6@107.7,41.575 108.723,41.575 108.898,41.4 109.13,41.4 109.555,40.975 R4.2@110.4,40.975
STATUS_B: R68.1 U1.3 | length 29.3
  Top Layer w0.25: U1.3@107.7,40.075 107.725,40.05 108.571,40.05 109.075,39.546 109.075,39.189 109.214,39.05 109.55,39.05 109.7,38.9 v1(109.7,38.1) ; v1(117.05,53.9) 117.2,54.05 117.2,57.246 117.125,57.321 117.125,57.925 118.275,59.075 R68.1@118.95,59.075
  Signal Layer 1 w0.25: v1(109.7,38.1) 109.734,38.1 117.65,46.016 117.65,53.3 v1(117.05,53.9)
STATUS_G: R69.1 U1.2 | length 31.8
  Top Layer w0.25: U1.2@107.7,39.575 107.725,39.55 108.435,39.55 108.625,39.36 108.625,38.65 108.7,38.575 v1(108.7,37.45) ; R69.1@118.95,57.175 118.95,56.7 118.225,55.975 118.225,54.715 118.95,53.99 121.035,53.99 v1(121.525,53.5)
  Signal Layer 1 w0.25: v1(108.7,37.45) 109.966,37.45 110.991,38.475 111.05,38.475 121.675,49.1 121.525,49.25 v1(121.525,53.5)
STATUS_R: R70.2 U1.4 | length 34
  Top Layer w0.25: U1.4@107.7,40.575 107.725,40.55 108.476,40.55 108.526,40.5 108.757,40.5 109.757,39.5 v1(110.25,39.5) ; R70.2@118.95,55.325 118.95,55.075 119.585,54.44 122.135,54.44 122.925,53.65 122.706,53.431 v1(122.706,52.903)
  Signal Layer 1 w0.25: v1(110.25,39.5) 110.497,39.5 117.2,46.203 117.2,52.866 116.425,53.641 116.425,54.159 116.791,54.525 121.575,54.525 122.706,53.394 v1(122.706,52.903)
SWCLK: DEBUG.4 U1.49 | length 12.8
  Top Layer w0.25: DEBUG.4@92.675,44.225 94.225,44.225 94.425,44.025 94.425,39.9 93.95,39.425 93.95,38.475 94.35,38.075 97.95,38.075 98.225,37.8 U1.49@98.225,37.1
SWDIO: DEBUG.2 U1.46 | length 8.1
  Top Layer w0.25: DEBUG.2@92.675,45.475 94.05,45.475 94.875,44.65 94.875,40.74 95.54,40.075 U1.46@96.25,40.075
VIN: "THUMB 1.10" "THUMB 1.11" "THUMB 1.12" "THUMB 1.13" "THUMB 1.14" "THUMB 1.15" "THUMB 1.16" "THUMB 1.17" "THUMB 1.18" "THUMB 2.10" "THUMB 2.11" "THUMB 2.12" "THUMB 2.13" "THUMB 2.14" "THUMB 2.15" "THUMB 2.16" "THUMB 2.17" "THUMB 2.18" C1.2 C3.2 C25.2 D1.1 D2.1 D6.2 INDEX.11 INDEX.12 INDEX.13 INDEX.14 INDEX.15 INDEX.16 INDEX.17 INDEX.18 INDEX.19 INDEX.20 MIDDLE.9 MIDDLE.10 MIDDLE.11 MIDDLE.12 MIDDLE.13 MIDDLE.14 MIDDLE.15 MIDDLE.16 PINKY.9 PINKY.10 PINKY.11 PINKY.12 PINKY.13 PINKY.14 PINKY.15 PINKY.16 POWER.1 R71.1 RING.11 RING.12 RING.13 RING.14 RING.15 RING.16 RING.17 RING.18 RING.19 RING.20 U2.1 U2.3 U3.1 U3.3 | length 143.4
  Top Layer w0.25: v1@117.45,34.45 v1(117.5,34.5)
  Top Layer w0.4: POWER.1@111.26,67.265 112.01,67.265 113.5,65.775 113.5,64.212 113.475,64.187 113.475,60.735 114.425,59.785 R71.1@114.425,58.825 115.325,57.925 v1(115.725,57.925) ; U3.1@113.3,46.45 114.1,46.45 v1(115.275,47.625) ; U3.3@113.3,48.35 114.55,48.35 v1(115.275,47.625) ; v1@117.45,34.45 U2.1@115.85,34.45 115.825,34.425 114.975,34.425 114.825,34.575 114.825,35.975 115.2,36.35 U2.3@115.85,36.35 115.85,47.05 v1(115.275,47.625)
  Signal Layer 2 w0.6: v1(115.275,47.625) 115.675,48.025 115.675,57.875 v1(115.725,57.925)
  Signal Layer 2 w3: 43.075,59.775 43.075,72.725 48.55,78.2 96.397,78.2 102.972,71.625 105.572,71.625 107.872,69.325 109.2,69.325 POWER.1@111.26,67.265
  Bottom Layer w0.25: C1.2@116.375,35.425 117.05,35.425 117.5,34.975 v1(117.5,34.5) 117.5,34.3 117,33.8 D1.1@116.588,33.8
  Bottom Layer w0.4: 109.05,67.262 111.258,67.262 POWER.1@111.26,67.265 111.345,67.35 C25.2@113.925,67.35 ; C3.2@113.8,48.325 114.575,48.325 v1(115.275,47.625) 114.3,46.65 D2.1@113.963,46.65
  other v1: 47.275,33.275 42.3,34.35 48.275,34.5 40.55,34.85 47.325,35.525 42.275,35.825 40.5,36.35 48.25,36.425 58.225,37.675 56.825,37.7 59.525,37.7 47.2,39.2 48.1,39.925 47.175,40.675 56.875,40.7 59.6,40.7 58.225,40.725 48.1,41.425 47.175,41.9 59.375,49.7 57.05,49.725 58.175,49.725 47,50.25 48.35,50.25 47,52.2 48.275,52.2 48.45,54.3 47.05,54.375 46.975,56.975 48.325,56.975 47.225,59.125 48.35,59.125 47.15,61.2 48.325,61.2
pads on no net: "THUMB 1." "THUMB 2." BUTTONS. D1.2 DEBUG.6 DEBUG.7 DEBUG.8 FAN. INDEX. MIDDLE. PINKY. POWER. RING. U1.10 U1.18 U1.61 U1.62 U2.4 U3.4
copper on no net:
  other v1: 89.125,62.025
  other v2: 112.175,37.15

## Polygon pours and split planes (outlines as drawn)
GND on Bottom Layer "GND PLANE" (solid, pour order 43): 124.25,26.5 124.25,78.75 26.5,78.75 26.5,26.5
VIN on Bottom Layer "VIN PLANE" (solid, pour order 13): 39.15,61.975 49.25,61.975 49.225,61.95 49.225,32.25 39.175,32.25
VIN on Bottom Layer "VIN PLANE" (solid, pour order 21): 56.25,61.5 60.25,61.5 60.25,35.2 56.225,35.2
VIN on Top Layer "VIN PLANE" (solid, pour order 9): 39.125,62 49.275,62 49.275,32.25 39.15,32.25
VIN on Top Layer "VIN PLANE" (solid, pour order 19): 56.25,61.475 56.275,61.5 60.5,61.5 60.25,61.25 60.25,35.3 56.25,35.3
VIN on Signal Layer 2 "VIN PLANE" (solid, pour order 29): 38.275,61.95 38.45,62.125 60.2,62.125 60.325,62 60.325,31.525 60.225,31.625 38.9,31.625

## Silkscreen, mask and mechanical layers (free items; w line width, h text height)
Mechanical 1:
  lines w0.2: 25.25,27.25 25.25,78.052 cw(c27.25,78.069) 27.25,80.069 ; 25.275,27.278 ccw(c27.286,27.278) 27.303,25.266 ; 27.25,80.075 123.052,80.075 cw(c123.069,78.075) 125.069,78.075 ; 27.286,25.275 123.501,25.275 ; 123.075,25.283 ccw(c123.075,27.283) 125.075,27.3 ; 125.075,27.275 125.075,78.075